# Altium PCB gemschematic_Chris_edits.PcbDoc
Units mm, origin at the board's own origin, x right, y up, seen from the top; angles counter-clockwise.
Board outline 88.88 x 100 mm, 2 copper layers (Top, Bottom); 21 components, 21 nets, 145 pads, 22 vias.
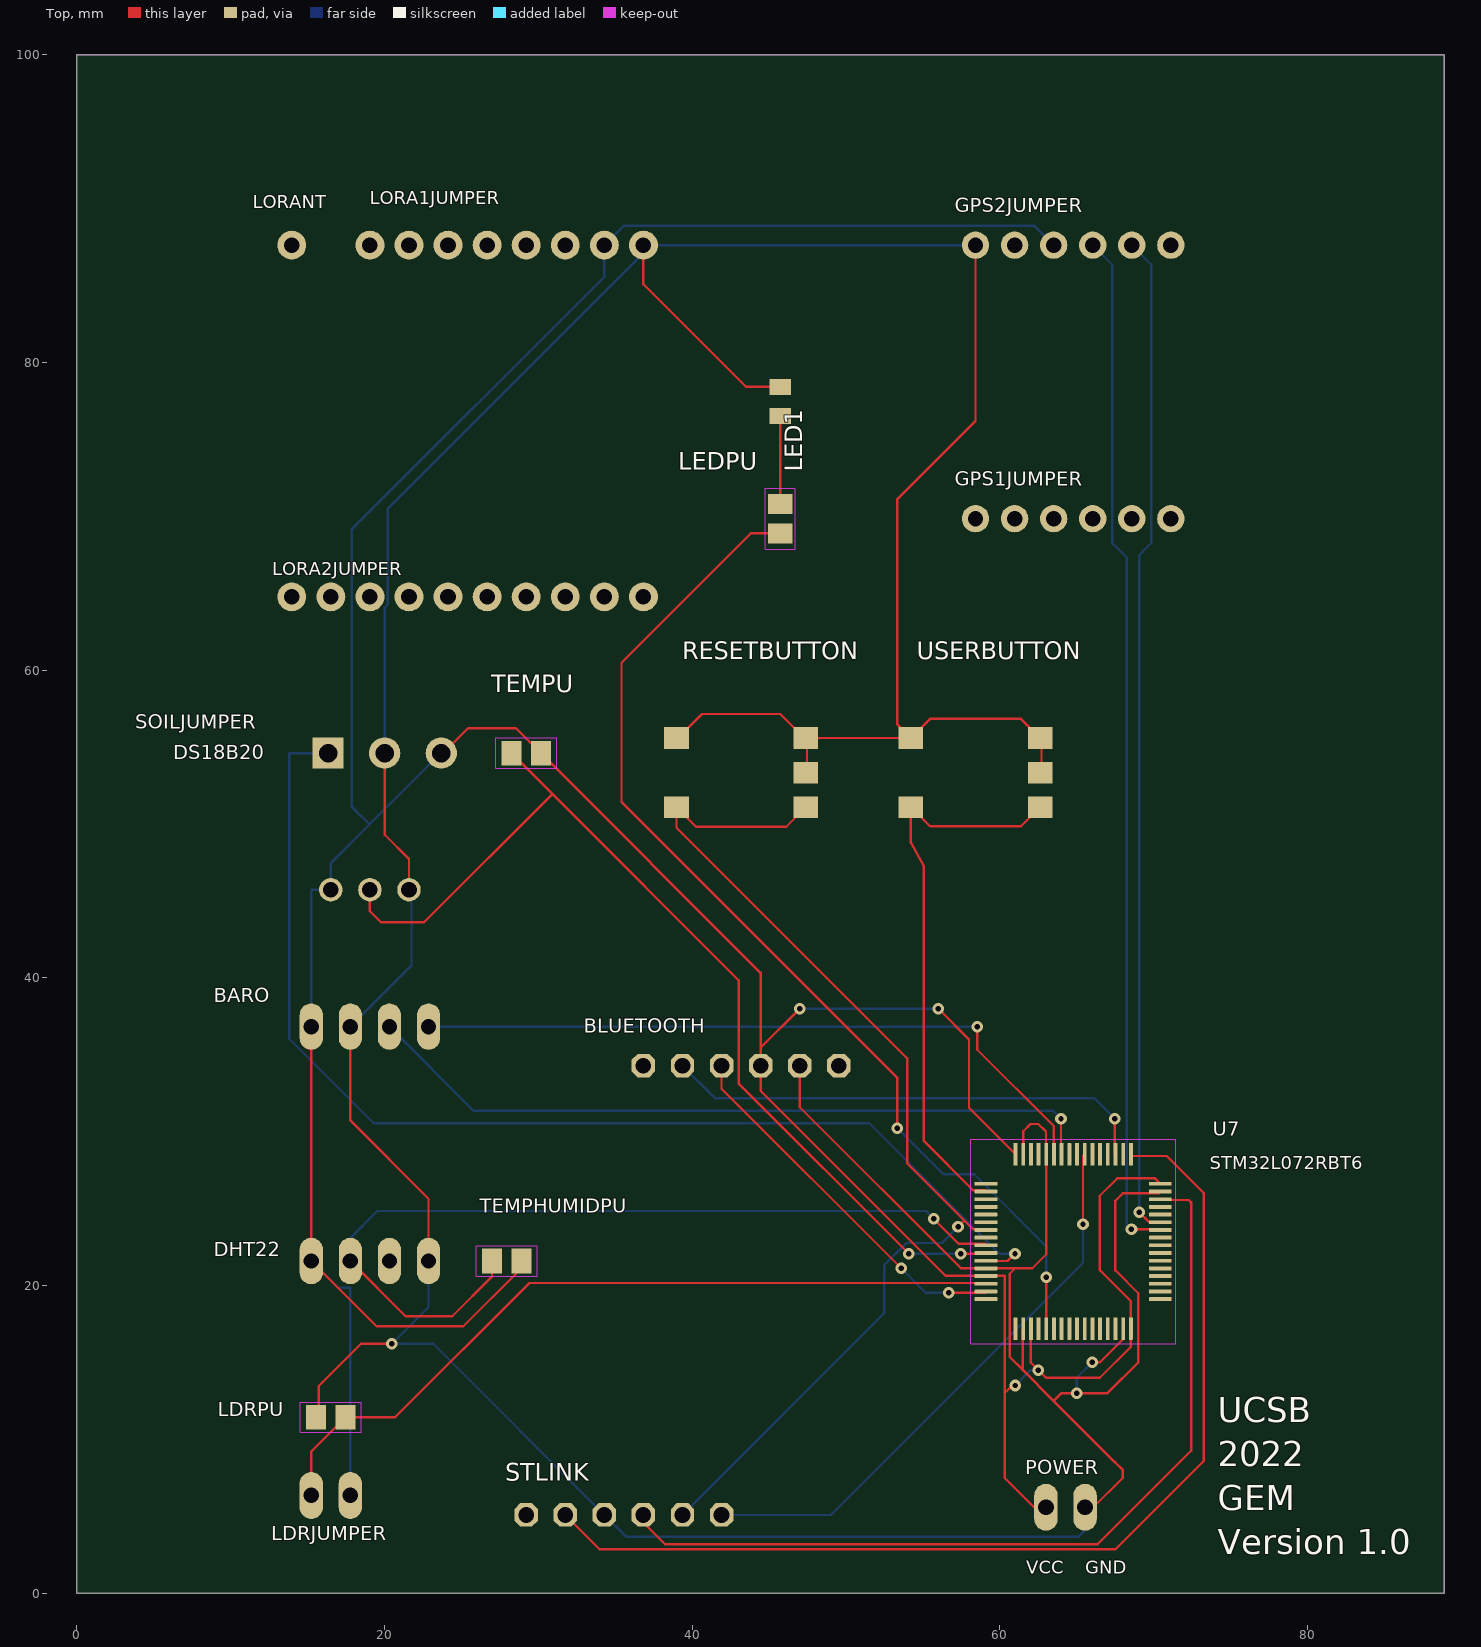
[diagram p0: Top view]
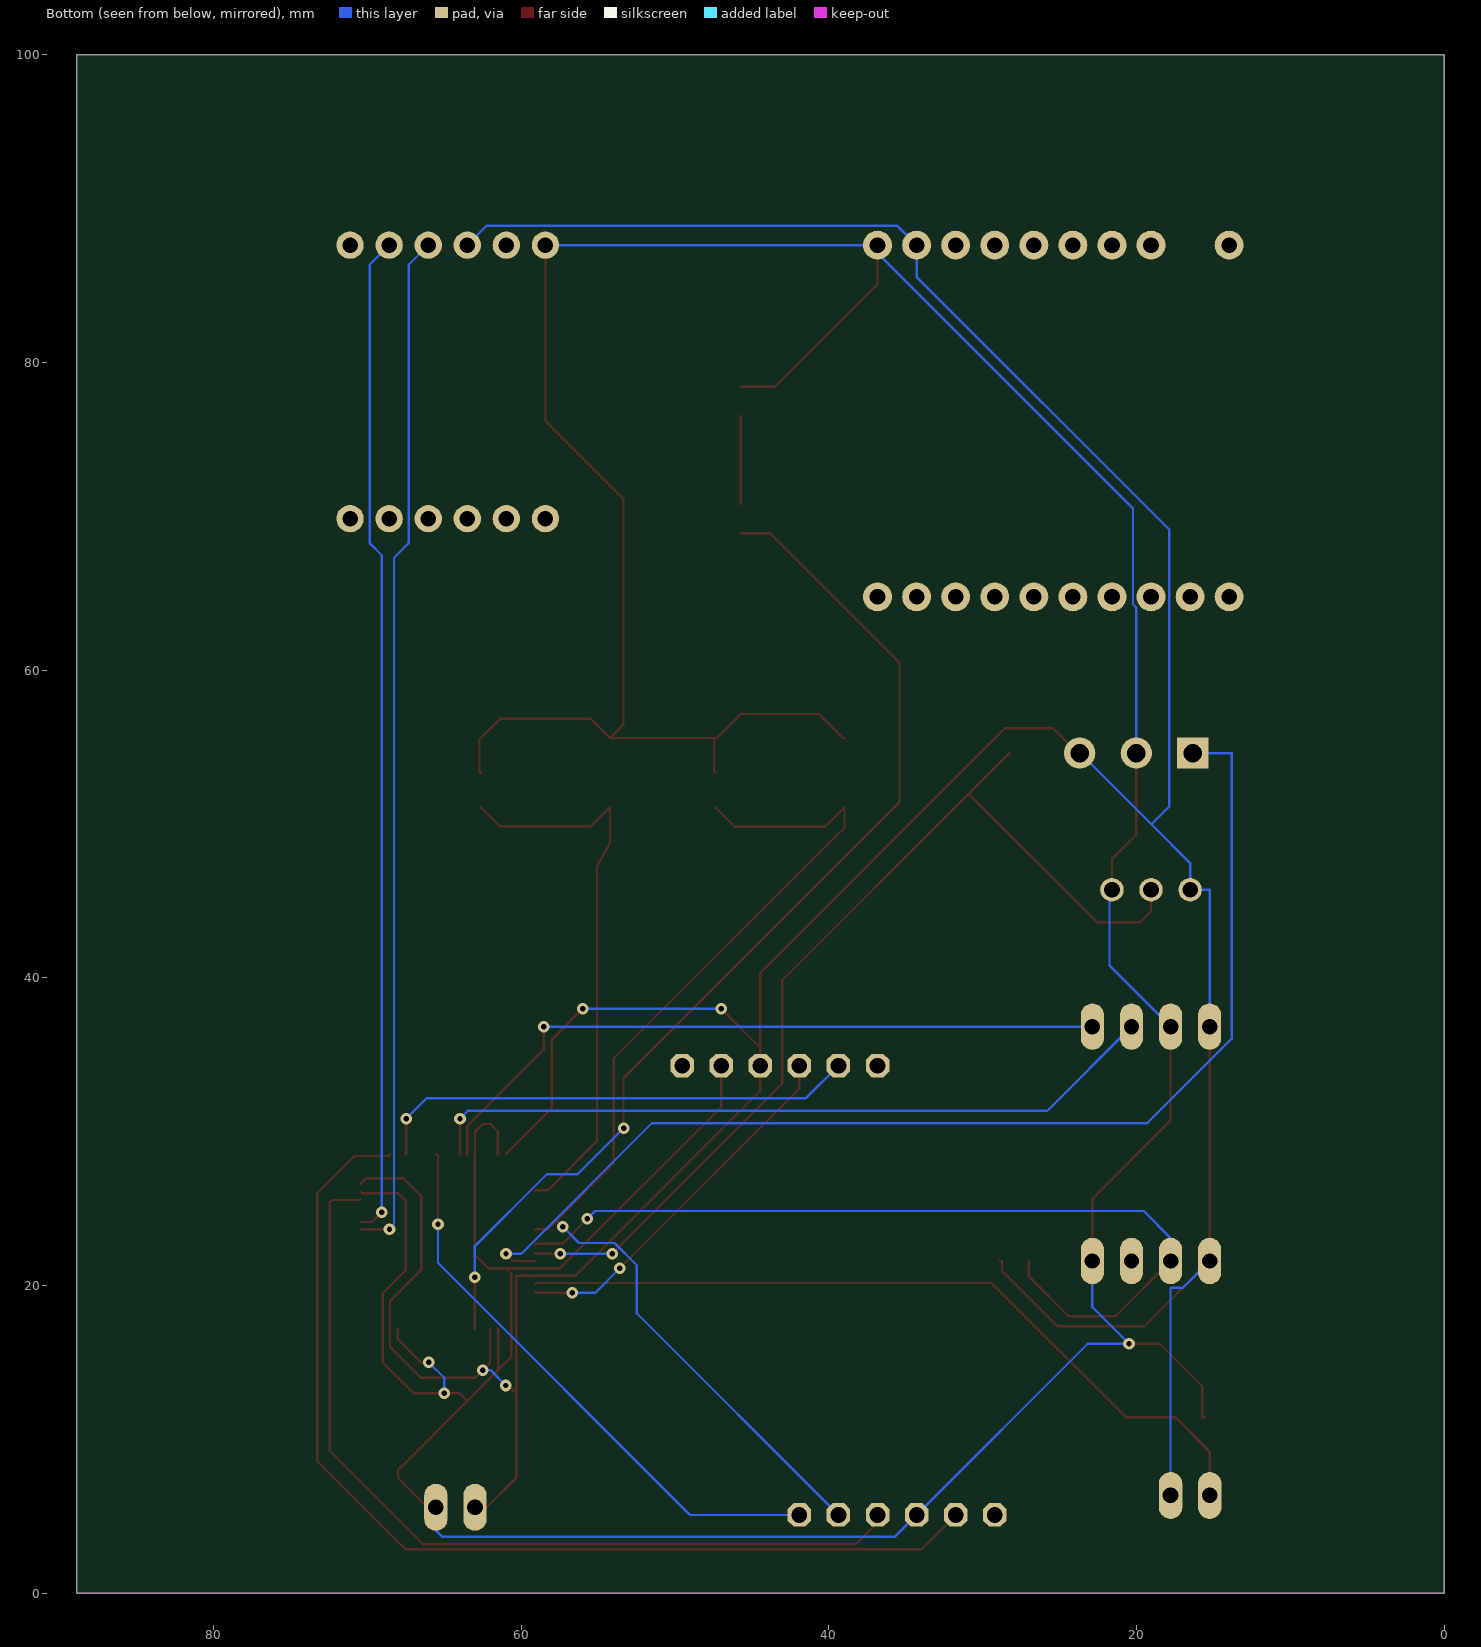
[diagram p1: Bottom view, seen from below]

## Layer stack, top to bottom
Top Solder: solder mask 0.0102, Solder Resist, Dk 3.5
Top: signal copper 0.035
Dielectric 1: dielectric 0.32, FR-4, Dk 4.8
Bottom: signal copper 0.035
Bottom Solder: solder mask 0.0102, Solder Resist, Dk 3.5

## Board outline
0,100 0,0 88.88,0 88.88,100

## Design rules (kind name [scope] priority, off if disabled: settings)
BoardOutlineClearance mdCopperDimension [All] p1: gap=0.254 ignorepadtopadclearanceinfootprint=FALSE except(0: Arc-SplitContinuation Track-SplitContinuation SMDPad-SplitContinuation THPad-SplitContinuation Via-SplitContinuation Fill-SplitContinuation Poly-SplitContinuation Region-SplitContinuation Text-SplitContinuation; 1.016: Poly-OutlineEdge Poly-CavityEdge Poly-CutoutEdge Poly-SplitBarrior)
Clearance "Clearance (Same Net)" [All] p1: gap=0.152 ignorepadtopadclearanceinfootprint=FALSE
Clearance [All] p2: gap=0.152 ignorepadtopadclearanceinfootprint=FALSE
HoleSize HoleSize_For_NetClass_lowpower [InNetClass('lowpower')] p1: absolutevalues=TRUE maxlimit=0.483 minlimit=0.483 maxpercent=80.000 minpercent=20.000
HoleSize HoleSize_For_NetClass_highpower [InNetClass('highpower')] p2: absolutevalues=TRUE maxlimit=0.483 minlimit=0.483 maxpercent=80.000 minpercent=20.000
HoleSize [All] p3: absolutevalues=TRUE maxlimit=2540 minlimit=0.35 maxpercent=80.000 minpercent=20.000
HoleToHoleClearance mdDrill [All] p1: gap=0.152 allowstackedmicrovias=TRUE
MinimumSolderMaskSliver [All] p1 off: minsoldermaskwidth=0.254
PasteMaskExpansion mlMinCreamFrame [All] p1: expansion=0
PolygonConnect ThermalVias [IsVia] p1: connectstyle=Direct reliefconductorwidth=0.254 reliefentries=4 polygonreliefangle="90 Angle" airgapwidth=0.254
PolygonConnect [All] p2: connectstyle=Relief reliefconductorwidth=0.254 reliefentries=4 polygonreliefangle="90 Angle" airgapwidth=0.254
RoutingVias [All] p1: holewidth=0.35 width=0.756 viastyle="Through Hole" minholewidth=0.35 minwidth=0.756 maxholewidth=2.54 maxwidth=2.54
SolderMaskExpansion mlMinStopFrame [All] p1: expansion=0.102 istentingtop=FALSE
Width Width_For_NetClass_lowpower [InNetClass('lowpower')] p1: maxlimit=0.61 minlimit=0.254 preferedwidth=0.305
Width Width_For_NetClass_highpower [InNetClass('highpower')] p2: maxlimit=0.813 minlimit=0.254 preferedwidth=0.406
Width [All] p3: maxlimit=254 minlimit=0.152 preferedwidth=0.152
26 further rules are at their usual default settings.

## Components (designator, comment, footprint, x,y, rotation, side; value= is the part's Value field where it differs from the comment)
BARO "22-23-2041" 22-23-2041 19.05,36.83 r0 top
BLUETOOTH "" 1X06 43.18,34.29 r0 top
DHT22 "22-23-2041" 22-23-2041 19.05,21.59 r0 top
DS18B20 "" 1X03 19.05,45.72 r0 top
GPS1JUMPER "" 1X06_ROUND_70 64.77,69.85 r0 top
GPS2JUMPER "" 1X06_ROUND_70 64.77,87.63 r0 top
LDRJUMPER "" 1X02 16.51,6.35 r0 top
LDRPU "270" M0805 16.51,11.43 r0 top
LED1 "" D-G080508G1-KS2_LEDC2012X85N 45.72,77.47 r270 top
LEDPU "510 Ohm" M0805 45.72,69.85 r90 top
LORA1JUMPER "" 1X08_NO_SILK 19.05,87.63 r0 top
LORA2JUMPER "" 1X10_NO_SILK 13.97,64.77 r0 top
LORANT "" 1X01_NO_SILK 13.97,87.63 r0 top
POWER "" 1X02 64.27,5.58 r0 top
RESETBUTTON "SKHMPSE010" SKHMPXE010 43.18,53.34 r0 top
SOILJUMPER "" SCREWTERMINAL-3.5MM-3_LOCK.007S 16.51,54.61 r0 top
STLINK "" 1X06 35.56,5.08 r0 top
TEMPHUMIDPU "4.7k" M0805 27.94,21.59 r0 top
TEMPU "4.7k" M0805 29.21,54.61 r0 top
U7 "" QFP50P1200X1200X160-64N 64.77,22.86 r0 top
USERBUTTON "SKHMPSE010" SKHMPXE010 58.42,53.34 r0 top

## Footprints (in the part's own frame and the unit in brackets; to place one, negate y for a bottom-side part, rotate by r counter-clockwise, add the part's x,y. Pads: shape width x height; smd on the part's side, far side on the other; paste and mask are expansions set on the pad)
1X01_NO_SILK [mil] "1X01_NO_SILK"
  round 74 hole 40: 1(0,0)
  body extent -37,-37 37,37, height 150
1X02 [mil] "1X02"
  oval 60x120 hole 40: 1(-50,0) 2(50,0)
  body extent -80,-60 80,60, height 150
1X03 [mil] "1X03"
  round 60 hole 40: 1(-100,0) 2(0,0) 3(100,0)
  body extent -130,-30 130,30, height 150
1X06 [mil] "1X06"
  oct 60x60 / inner round 55.43 / far side oct 60x60 hole 40: 1(-250,0) 2(-150,0) 3(-50,0) 4(50,0) 5(150,0) 6(250,0)
  body extent -278,-28 278,28, height 150
1X06_ROUND_70 [mil] "1X06_ROUND_70"
  round 70 hole 39.37: 1(-250,0) 2(-150,0) 3(-50,0) 4(50,0) 5(150,0) 6(250,0)
  body extent -304,-35 285,35, height 150
1X08_NO_SILK [mil] "1X08_NO_SILK"
  round 74 hole 40: 1(0,0) 2(100,0) 3(200,0) 4(300,0) 5(400,0) 6(500,0) 7(600,0) 8(700,0)
  body extent -37,-37 737,37, height 150
1X10_NO_SILK [mil] "1X10_NO_SILK"
  round 74 hole 40: 1(0,0) 2(100,0) 3(200,0) 4(300,0) 5(400,0) 6(500,0) 7(600,0) 8(700,0) 9(800,0) 10(900,0)
  body extent -37,-37 937,37, height 150
22-23-2041 [mm] "22-23-2041"
  oval 1.508x3.016 hole 1: 1(-3.81,0) 2(-1.27,0) 3(1.27,0) 4(3.81,0)
  body extent -4.57,-1.51 4.57,1.51, height 1.27
D-G080508G1-KS2_LEDC2012X85N [mm] "D-G080508G1-KS2_LEDC2012X85N"
  rect 1.05x1.4 smd: 1(-0.95,0) 2(0.95,0)
  body extent -1.95,-1.18 1.95,1.18, height 3.81
M0805 [mm] "M0805"
  rect 1.3x1.6 smd: 1(-0.95,0) 2(0.95,0)
  Top keep-out lines w0.051: -1.973,-0.983 -1.973,0.983 1.973,0.983 1.973,-0.983 -1.973,-0.983
  body extent -2,-1.01 2,1.01, height 3.81
QFP50P1200X1200X160-64N [mm] "QFP50P1200X1200X160-64N"
  rrect25% 1.47x0.25 smd: 1(-5.67,3.75) 2(-5.67,3.25) 3(-5.67,2.75) 4(-5.67,2.25) 5(-5.67,1.75) 6(-5.67,1.25) 7(-5.67,0.75) 8(-5.67,0.25) 9(-5.67,-0.25) 10(-5.67,-0.75) 11(-5.67,-1.25) 12(-5.67,-1.75) 13(-5.67,-2.25) 14(-5.67,-2.75) 15(-5.67,-3.25) 16(-5.67,-3.75) 33(5.67,-3.75) 34(5.67,-3.25) 35(5.67,-2.75) 36(5.67,-2.25) 37(5.67,-1.75) 38(5.67,-1.25) 39(5.67,-0.75) 40(5.67,-0.25) 41(5.67,0.25) 42(5.67,0.75) 43(5.67,1.25) 44(5.67,1.75) 45(5.67,2.25) 46(5.67,2.75) 47(5.67,3.25) 48(5.67,3.75)
  rrect25% 0.25x1.47 smd: 17(-3.75,-5.67) 18(-3.25,-5.67) 19(-2.75,-5.67) 20(-2.25,-5.67) 21(-1.75,-5.67) 22(-1.25,-5.67) 23(-0.75,-5.67) 24(-0.25,-5.67) 25(0.25,-5.67) 26(0.75,-5.67) 27(1.25,-5.67) 28(1.75,-5.67) 29(2.25,-5.67) 30(2.75,-5.67) 31(3.25,-5.67) 32(3.75,-5.67) 49(3.75,5.67) 50(3.25,5.67) 51(2.75,5.67) 52(2.25,5.67) 53(1.75,5.67) 54(1.25,5.67) 55(0.75,5.67) 56(0.25,5.67) 57(-0.25,5.67) 58(-0.75,5.67) 59(-1.25,5.67) 60(-1.75,5.67) 61(-2.25,5.67) 62(-2.75,5.67) 63(-3.25,5.67) 64(-3.75,5.67)
  Top keep-out lines w0.05: -6.655,-6.655 -6.655,6.655 6.655,6.655 6.655,-6.655 -6.655,-6.655
  body extent -7.34,-6.68 6.68,6.68, height 3.81
SCREWTERMINAL-3.5MM-3_LOCK.007S [mil] "SCREWTERMINAL-3.5MM-3_LOCK.007S"
  rect 80x80 / inner round 73.91 / far side rect 80x80 hole 47.24: 1(-7,0)
  round 80 hole 47.24: 2(137.8,0) 3(282.59,0)
  body extent -111,-97 386,128, height 150
SKHMPXE010 [mm] "SKHMPXE010"
  rect 1.6x1.4 smd: 1(-4.2,2.25) 2(4.2,2.25) 3(-4.2,-2.25) 4(4.2,-2.25) 5(4.2,0)
  body extent -5,-2.95 5,2.95, height 3.81

## Part data
BARO DHT22: ".100\" (2.54mm) Center Header - 4 Pin", DeviceSetName=22-23-2041, GateName_1=-1, GateName_2=-2, GateName_3=-3, GateName_4=-4, LibraryName=con-molex, MF=MOLEX, MPN=22-23-2041, OC_FARNELL=1462920, OC_NEWARK=38C0355, POPULARITY=21, SymbolName_1=MV, SymbolName_2=M, SymbolName_3=M, SymbolName_4=M
BLUETOOTH STLINK: library part 1X06, "PIN HEADER", DeviceSetName=PINHD-1X6, GateName_1=A, LibraryName=adafruit, SymbolName_1=PINHD6
DS18B20: library part 1X03, "PIN HEADER", DeviceSetName=PINHD-1X3, GateName_1=A, LibraryName=adafruit, SymbolName_1=PINHD3
GPS1JUMPER GPS2JUMPER: library part 1X06_ROUND_70, "PIN HEADER", DeviceName=70MIL, DeviceSetName=HEADER-1X6, GateName_1=A, LibraryName=microbuilder, SymbolName_1=PINHD6
LDRJUMPER POWER: library part 1X02, "PIN HEADER", DeviceSetName=PINHD-1X2, GateName_1=G$1, LibraryName=pinhead, POPULARITY=98, SymbolName_1=PINHD2
LDRPU LEDPU TEMPHUMIDPU TEMPU: library part M0805, "RESISTOR, American symbol", DeviceName=M0805, DeviceSetName=R-US_, GateName_1=G$1, LibraryName=adafruit, SymbolName_1=R-US
LED1: library part D-G080508G1-KS2_LEDC2012X85N, "Light Emitting Diodes (LED) Green 526~531nm 250~330mcd@5mA Top View 0805 RoHS   Source:  Datasheet", MANUFACTURER_NAME="Wuxi ARK Tech Elec", MANUFACTURER_PART_NUMBER=D-G080508G1-KS2, ARROW_PART_NUMBER=ARROW_PART_NUMBER, ARROW_PRICE-STOCK=ARROW_PRICE-STOCK, DeviceSetName=D-G080508G1-KS2_D-G080508G1-KS2, GateName_1=G$1, HEIGHT=0.85mm, LibraryName=ce-capstone-2022, MOUSER_PART_NUMBER=MOUSER_PART_NUMBER, MOUSER_PRICE-STOCK=MOUSER_PRICE-STOCK, SymbolName_1=D-G080508G1-KS2_D-G080508G1-KS2
LORA1JUMPER: library part 1X08_NO_SILK, "Multi connection point. Often used as Generic Header-pin footprint for 0.1 inch spaced/style header connections    On any of the 0.1 inch spaced packages, you can populate with these:  Break Away Headers - Straight (PRT-00116)   Break Away Male Headers - Right Angle (PRT-00553)   Female Headers (PRT-00115)   Break Away Headers - Machine Pin (PRT-00117)   Break Away Female Headers - Swiss Machine Pin (PRT-00743)   Arduino Stackable Header - 8 Pin (PRT-09279)        For SCREWTERMINALS and SPRING TERMINALS visit here:  Screw Terimnals on SparkFun.com (5mm/3.5mm/2.54mm spacing)       This device is also useful as a general connection point to wire up your design to another part of your project. Our various solder wires solder well into these plated through hole pads.  Hook-Up Wire - Assortment (Stranded, 22 AWG) (PRT-11375)   Hook-Up Wire - Assortment (Solid Core, 22 AWG) (PRT-11367)   View the entire wire category on our website here          Special notes:     Molex polarized connector foot print use with SKU : PRT-08231 with associated crimp pins and housings. 1MM SMD Version SKU: PRT-10208    NOTES ON THE VARIANTS LOCK and LOCK_LONGPADS... This footprint was designed to help hold the alignment of a through-hole component (i.e.  6-pin header) while soldering it into place. You may notice that each hole has been shifted either up or down by 0.005 of an inch from it's more standard position (which is a perfectly straight line).  This slight alteration caused the pins (the squares in the middle) to touch the edges of the holes.  Because they are alternating, it causes a \"brace\" to hold the component in place.  0.005 has proven to be the perfect amount of \"off-center\" position when using our standard breakaway headers. Although looks a little odd when you look at the bare footprint, once you have a header in there, the alteration is very hard to notice.  Also,if you push a header all the way into place, it is covered up entirely on the bottom side.", DeviceName=NO_SILK_FEMALE_PTH, DeviceSetName=CONN_08, GateName_1=G$1, LibraryName=SparkFun-Connectors, PROD_ID=CONN-08438, SymbolName_1=CONN_08
LORA2JUMPER: library part 1X10_NO_SILK, "Multi connection point. Often used as Generic Header-pin footprint for 0.1 inch spaced/style header connections    On any of the 0.1 inch spaced packages, you can populate with these:  Break Away Headers - Straight (PRT-00116)   Break Away Male Headers - Right Angle (PRT-00553)   Female Headers (PRT-00115)   Break Away Headers - Machine Pin (PRT-00117)   Break Away Female Headers - Swiss Machine Pin (PRT-00743)   Arduino Stackable Header - 10 Pin (PRT-11376)        For SCREWTERMINALS and SPRING TERMINALS visit here:  Screw Terimnals on SparkFun.com (5mm/3.5mm/2.54mm spacing)       This device is also useful as a general connection point to wire up your design to another part of your project. Our various solder wires solder well into these plated through hole pads.  Hook-Up Wire - Assortment (Stranded, 22 AWG) (PRT-11375)   Hook-Up Wire - Assortment (Solid Core, 22 AWG) (PRT-11367)   View the entire wire category on our website here          Special notes:     Molex polarized connector foot print use with SKU : PRT-08231 with associated crimp pins and housings. 1MM SMD Version SKU: PRT-10208    NOTES ON THE VARIANTS LOCK and LOCK_LONGPADS... This footprint was designed to help hold the alignment of a through-hole component (i.e.  6-pin header) while soldering it into place. You may notice that each hole has been shifted either up or down by 0.005 of an inch from it's more standard position (which is a perfectly straight line).  This slight alteration caused the pins (the squares in the middle) to touch the edges of the holes.  Because they are alternating, it causes a \"brace\" to hold the component in place.  0.005 has proven to be the perfect amount of \"off-center\" position when using our standard breakaway headers. Although looks a little odd when you look at the bare footprint, once you have a header in there, the alteration is very hard to notice.  Also,if you push a header all the way into place, it is covered up entirely on the bottom side.", DeviceName=NO_SILK_PTH_FEMALE, DeviceSetName=CONN_10, GateName_1=G$1, LibraryName=SparkFun-Connectors, PROD_ID=CONN-11563, SymbolName_1=CONN_10
LORANT: library part 1X01_NO_SILK, "Single connection point. Often used as Generic Header-pin footprint for 0.1 inch spaced/style header connections       On any of the 0.1 inch spaced packages, you can populate with these:   Break Away Headers - Straight (PRT-00116)   Break Away Male Headers - Right Angle (PRT-00553)   Female Headers (PRT-00115)   Break Away Headers - Machine Pin (PRT-00117)   Break Away Female Headers - Swiss Machine Pin (PRT-00743)          This device is also useful as a general connection point to wire up your design to another part of your project. Our various solder wires solder well into these plated through hole pads.   Hook-Up Wire - Assortment (Stranded, 22 AWG) (PRT-11375)   Hook-Up Wire - Assortment (Solid Core, 22 AWG) (PRT-11367)   View the entire wire category on our website here          Special notes:    SMTSO-256-ET is a \"flush mount\" nut for a 4-40 screw. We mostly use this on specialty testbeds; it is a nice way to connect hardware to your PCB at an adjustable hieght.    Also note, the SNAP packages are for using a snappable style connector. We sell a baggie of snaps and they are also used on two LilyPad designs:   Snap Assortment - 30 pack (male and female) (DEV-11347)  LilyPad Arduino SimpleSnap (DEV-10941)   LilyPad SimpleSnap Protoboard (DEV-10940)", DeviceName=PTH_NO_SILK_YES_STOP, DeviceSetName=CONN_01, GateName_1=G$1, LibraryName=SparkFun-Connectors, SymbolName_1=CONN_01
RESETBUTTON USERBUTTON: library part SKHMPXE010, "6.2 X 6.5mm TACT Switch (SMD)   Source: http://www3.alps.co.jp/WebObjects/catalog.woa/PDF/E/Switch/Tact/SKHM/SKHM.PDF", DeviceSetName=SKHMP*E010, GateName_1=G$1, LibraryName=switch, POPULARITY=5, SymbolName_1=NORMOPEN_SHIELD
SOILJUMPER: library part SCREWTERMINAL-3.5MM-3_LOCK.007S, "Header 3Standard 3-pin 0.1\" header. Use with straight break away headers (SKU : PRT-00116), right angle break away headers (PRT-00553), swiss pins (PRT-00743), machine pins (PRT-00117), and female headers (PRT-00115). Molex polarized connector foot print use with SKU : PRT-08232 with associated crimp pins and housings.", DeviceName=SCREW_LOCK, DeviceSetName=M03, GateName_1=G$1, LibraryName=SparkFun-Connectors, PROD_ID=CONN-08288, SymbolName_1=M03
U7: library part QFP50P1200X1200X160-64N, "None Check availability", PACKAGE="LQFP-64 STMicroelectronics", AVAILABILITY="In Stock", DeviceSetName=STM32L073RZT6, GateName_1=G$1, LibraryName=STM32L073RZT6, MF=STMicroelectronics, MP=STM32L073RZT6, PRICE=None, PURCHASE-URL=https://pricing.snapeda.com/search/part/STM32L073RZT6/?ref=eda, SymbolName_1=STM32L073RZT6

## Via types
v1: diameter 0.756/0.756 (per signal layer), hole 0.35, Top to Bottom, 22 vias

## Nets (pads, with @x,y where several pads share a name; then routed paths per layer and width w, separated by ;. In a path a pad name is that pad's centre, name@x,y a point inside that pad or via, vN(x,y) a via of type N, cw(c..) or ccw(c..) an arc to the next point about the centre after c; other vN are vias at no path point)
1PPS: GPS2JUMPER.2
BTRX: BLUETOOTH.2 U7.51 | length 31.9
  Top w0.152: v1(67.469,30.845) 67.469,28.575 U7.51
  Bottom w0.152: BLUETOOTH.2 41.481,32.179 66.135,32.179 v1(67.469,30.845)
BTTX: BLUETOOTH.3 U7.15 | length 24.2
  Top w0.152: BLUETOOTH.3 41.91,32.79 v1(53.586,21.114) ; v1(56.674,19.526) 59.055,19.526 U7.15
  Bottom w0.152: v1(53.586,21.114) 55.174,19.526 v1(56.674,19.526)
GND: BARO.2 BLUETOOTH.5 DHT22.4 DS18B20.3 GPS2JUMPER.1 LDRPU.1 LED1.1 LORA1JUMPER.8 POWER.2 RESETBUTTON.1 RESETBUTTON.2 RESETBUTTON.5 SOILJUMPER.2 STLINK.3 U7.12 U7.18 U7.31 U7.47 U7.60 U7.63 USERBUTTON.1 USERBUTTON.2 USERBUTTON.5 | length 329.1
  Top w0.152: LDRPU.1 15.716,11.43 15.716,13.446 18.479,16.209 v1(20.479,16.209) ; BARO.2 17.78,30.72 22.86,25.64 DHT22.4 ; SOILJUMPER.2 20.01,49.3 21.59,47.72 DS18B20.3 ; LORA1JUMPER.8 36.83,85.09 43.5,78.42 LED1.1 ; RESETBUTTON.1 39.052,55.562 40.64,57.15 45.72,57.15 47.28,55.59 RESETBUTTON.2 ; BLUETOOTH.5 46.99,31.591 57.468,21.114 59.055,21.114 U7.12 59.214,21.114 61,21.114 ; RESETBUTTON.5 47.466,53.426 47.466,55.504 RESETBUTTON.2 ; GPS2JUMPER.1 58.42,76.2 53.34,71.12 53.34,56.47 USERBUTTON.1 ; U7.18 61.497,17.167 61.497,14.497 ; U7.63 61.52,30.02 62,30.5 62.5,30.5 63,30 63,28.55 U7.60 63.024,28.416 63.024,22.024 62.114,21.114 61,21.114 ; USERBUTTON.5 62.706,53.34 62.706,55.562 USERBUTTON.2 61.378,56.832 55.462,56.832 USERBUTTON.1 ; POWER.2 66.08,5.58 68,7.5 68,8 67.5,8.5 67.494,8.5 63.497,12.497 ; v1(66,15) 66.5,15 68.02,16.52 U7.31 ; U7.47 70.33,26 68,26 67.5,25.5 67.5,21 69,19.5 69,15 67,13 v1(65,13) 64,13 63.497,12.497 ; RESETBUTTON.2 USERBUTTON.1 ; 61,21.114 60.642,20.756 60.642,15.351 61.497,14.497 ; 61.497,14.497 63.497,12.497
  Bottom w0.152: BARO.2 21.749,40.799 21.749,45.72 DS18B20.3 ; SOILJUMPER.2 20.01,64.078 20.218,64.286 20.218,70.519 36.83,87.13 LORA1JUMPER.8 GPS2JUMPER.1 ; DHT22.4 22.86,18.59 v1(20.479,16.209) 23.161,16.209 STLINK.3 35.695,3.675 65.135,3.675 65.54,4.08 POWER.2 ; v1(65,13) 65,14 v1(66,15)
GPSRX: GPS2JUMPER.4 U7.42 | length 66.9
  Top w0.152: v1(68.556,23.654) 70.326,23.654 U7.42
  Bottom w0.152: GPS2JUMPER.4 67.31,86.36 67.31,68.263 68.263,67.31 68.263,23.948 v1(68.556,23.654)
GPSTX: GPS2JUMPER.5 U7.43 | length 65.4
  Top w0.152: v1(69.056,24.765) 69.691,24.13 70.326,24.13 U7.43
  Bottom w0.152: GPS2JUMPER.5 69.85,86.36 69.85,68.263 69.056,67.469 v1(69.056,24.765)
LED: LEDPU.1 U7.21 | length 69.7
  Top w0.152: LEDPU.1 43.818,68.9 35.401,60.484 35.401,51.435 53.34,33.496 v1(53.34,30.226) ; U7.21 63.024,17.304 v1(63.024,20.543)
  Bottom w0.152: v1(53.34,30.226) 56.34,27.226 58.34,27.226 63.024,22.543 v1(63.024,20.543)
N$1: LED1.2 LEDPU.2 | length 5.7
  Top w0.152: LEDPU.2 LED1.2
NRST: RESETBUTTON.3 RESETBUTTON.4 STLINK.5 U7.7 | length 73.8
  Top w0.152: RESETBUTTON.4 46.11,49.82 40.25,49.82 RESETBUTTON.3 38.98,49.761 53.975,34.766 53.975,27.94 57.694,24.221 ; v1(57.285,23.812) 57.694,24.221 ; U7.7 59.055,23.654 58.261,23.654 57.694,24.221
  Bottom w0.152: STLINK.5 52.479,18.189 52.479,21.318 53.926,22.764 56.236,22.764 v1(57.285,23.812)
PA0LDR: LDRJUMPER.1 LDRPU.2 U7.14 | length 51.3
  Top w0.152: LDRJUMPER.1 15.24,9.207 LDRPU.2@17.462,11.43 ; LDRPU.2 LDRPU.2@17.462,11.43 ; U7.14 59.055,20.161 29.416,20.161 20.685,11.43 LDRPU.2@17.462,11.43
PC1DHT: DHT22.2 TEMPHUMIDPU.1 U7.9 | length 57.3
  Top w0.152: DHT22.2 21.37,18 24.4,18 26.99,20.59 TEMPHUMIDPU.1 ; v1(55.698,24.336) 57.333,22.701 59.055,22.701 U7.9
  Bottom w0.152: DHT22.2 17.78,23.09 19.526,24.836 55.198,24.836 v1(55.698,24.336)
PC2DS18B20: DS18B20.2 TEMPU.1 U7.10 | length 65.3
  Top w0.152: DS18B20.2 19.05,44.331 19.772,43.609 22.566,43.609 30.913,51.955 ; TEMPU.1 28.258,54.61 30.913,51.955 ; v1(54.086,22.066) 43.021,33.131 43.021,39.846 30.913,51.955 ; v1(57.468,22.066) 59.055,22.066 U7.10
  Bottom w0.152: v1(54.086,22.066) v1(57.468,22.066)
PC3SOIL: SOILJUMPER.1 U7.11 | length 76.1
  Top w0.152: U7.11 59.214,21.59 60.508,21.59 v1(60.984,22.066)
  Bottom w0.152: SOILJUMPER.1 13.811,54.61 13.811,36.036 19.304,30.544 51.506,30.544 59.984,22.066 v1(60.984,22.066)
SCLBARO: BARO.3 U7.58 | length 48.5
  Top w0.152: v1(63.976,30.845) 63.976,28.575 U7.58
  Bottom w0.152: BARO.3 25.789,31.361 63.46,31.361 v1(63.976,30.845)
SDABARO: BARO.4 U7.59 | length 46
  Top w0.152: v1(58.539,36.83) 58.539,35.33 63.5,30.369 63.5,28.575 U7.59
  Bottom w0.152: BARO.4 v1(58.539,36.83)
SWCLKSTLINK: STLINK.2 U7.49 | length 68
  Top w0.152: STLINK.2 33.972,2.857 67.516,2.857 73.255,8.596 73.255,26.011 70.85,28.416 68.58,28.416 U7.49
SWDIOSTLINK: STLINK.4 U7.46 | length 57.4
  Top w0.152: STLINK.4 36.83,4.58 38.235,3.175 66.358,3.175 72.437,9.255 72.437,25.4 72.279,25.559 70.485,25.559 U7.46
SWOSTLINK: STLINK.6 U7.55 | length 37.4
  Top w0.152: v1(65.405,23.971) 65.405,28.416 U7.55
  Bottom w0.152: STLINK.6 49.014,5.08 65.405,21.471 v1(65.405,23.971)
USERBUTTON: U7.2 USERBUTTON.3 USERBUTTON.4 | length 36.8
  Top w0.152: U7.2 59.055,26.194 58.261,26.194 55.063,29.393 55.063,47.266 54.22,48.791 USERBUTTON.3 55.462,49.847 61.378,49.847 USERBUTTON.4
VCC: BARO.1 BLUETOOTH.4 DHT22.1 DS18B20.1 GPS2JUMPER.3 LDRJUMPER.2 LORA1JUMPER.7 POWER.1 SOILJUMPER.3 TEMPHUMIDPU.2 TEMPU.2 U7.13 U7.19 U7.32 U7.48 U7.64 | length 273.2
  Top w0.152: BARO.1 DHT22.1 19.486,17.344 25.122,17.344 28.734,20.955 28.734,21.59 TEMPHUMIDPU.2 ; SOILJUMPER.3 23.812,54.61 25.424,56.221 28.551,56.221 30.16,54.613 TEMPU.2 30.162,54.61 44.45,40.322 BLUETOOTH.4 ; v1(47,38) 44.45,35.45 BLUETOOTH.4 ; v1(56,38) 58,36 58,31.55 U7.64 ; v1(61,13.5) 60.825,13.5 60.325,13 ; U7.19 62.02,14.98 v1(62.5,14.5) 63,14 66.5,14 68.52,16.02 U7.32 68.52,18.98 66.5,21 66.5,25.835 67.629,26.964 70.086,26.964 U7.48 ; POWER.1 62.23,5.58 60.325,7.485 60.325,13 ; BLUETOOTH.4 44.45,32.655 56.468,20.637 59.055,20.637 U7.13 59.214,20.637 60.325,20.637 60.325,13
  Bottom w0.152: DHT22.1 16.986,19.844 17.78,19.844 LDRJUMPER.2 ; BARO.1 15.24,45.72 DS18B20.1 16.51,47.466 19.022,49.978 ; SOILJUMPER.3 23.654,54.61 19.022,49.978 ; v1(47,38) v1(56,38) ; v1(61,13.5) 62,14.5 v1(62.5,14.5) ; GPS2JUMPER.3 62.23,88.9 35.56,88.9 LORA1JUMPER.7 34.29,85.566 17.862,69.138 17.862,51.138 19.022,49.978
VLCD: U7.1
pads on no net: BLUETOOTH.1 BLUETOOTH.6 DHT22.3 GPS1JUMPER.1 GPS1JUMPER.2 GPS1JUMPER.3 GPS1JUMPER.4 GPS1JUMPER.5 GPS1JUMPER.6 GPS2JUMPER.6 LORA1JUMPER.1 LORA1JUMPER.2 LORA1JUMPER.3 LORA1JUMPER.4 LORA1JUMPER.5 LORA1JUMPER.6 LORA2JUMPER.1 LORA2JUMPER.2 LORA2JUMPER.3 LORA2JUMPER.4 LORA2JUMPER.5 LORA2JUMPER.6 LORA2JUMPER.7 LORA2JUMPER.8 LORA2JUMPER.9 LORA2JUMPER.10 LORANT.1 STLINK.1 U7.3 U7.4 U7.5 U7.6 U7.8 U7.16 U7.17 U7.20 U7.22 U7.23 U7.24 U7.25 U7.26 U7.27 U7.28 U7.29 U7.30 U7.33 U7.34 U7.35 U7.36 U7.37 U7.38 U7.39 U7.40 U7.41 U7.44 U7.45 U7.50 U7.52 U7.53 U7.54 U7.56 U7.57 U7.61 U7.62

## Keep-outs
Keep-Out Layer:
  the board outline again, w0

## Silkscreen, mask and mechanical layers (free items; w line width, h text height)
Top Overlay:
  text "STM32L072RBT6" at 73.66,27.54 h0.86
  text "UCSB" at 74.16,11.112 h1.62
  text "2022" at 74.16,8.255 h1.62
  text "GEM" at 74.16,5.397 h1.62
  text "Version 1.0" at 74.16,2.54 h1.62
  text "VCC" at 61.73,1.27 h0.86
  text "GND" at 65.54,1.27 h0.86
Dimension:
  the board outline again, w0